# Altium PCB My_PCB.PcbDoc (part 2 of 2)
Units mm, origin at the board's own origin, x right, y up, seen from the top; angles counter-clockwise.
Board outline 160 x 126 mm, 4 copper layers (Top Layer, Layer 1, Layer 2, Bottom Layer), stack 1.646 mm thick; 190 components, 111 nets, 517 pads, 777 vias.
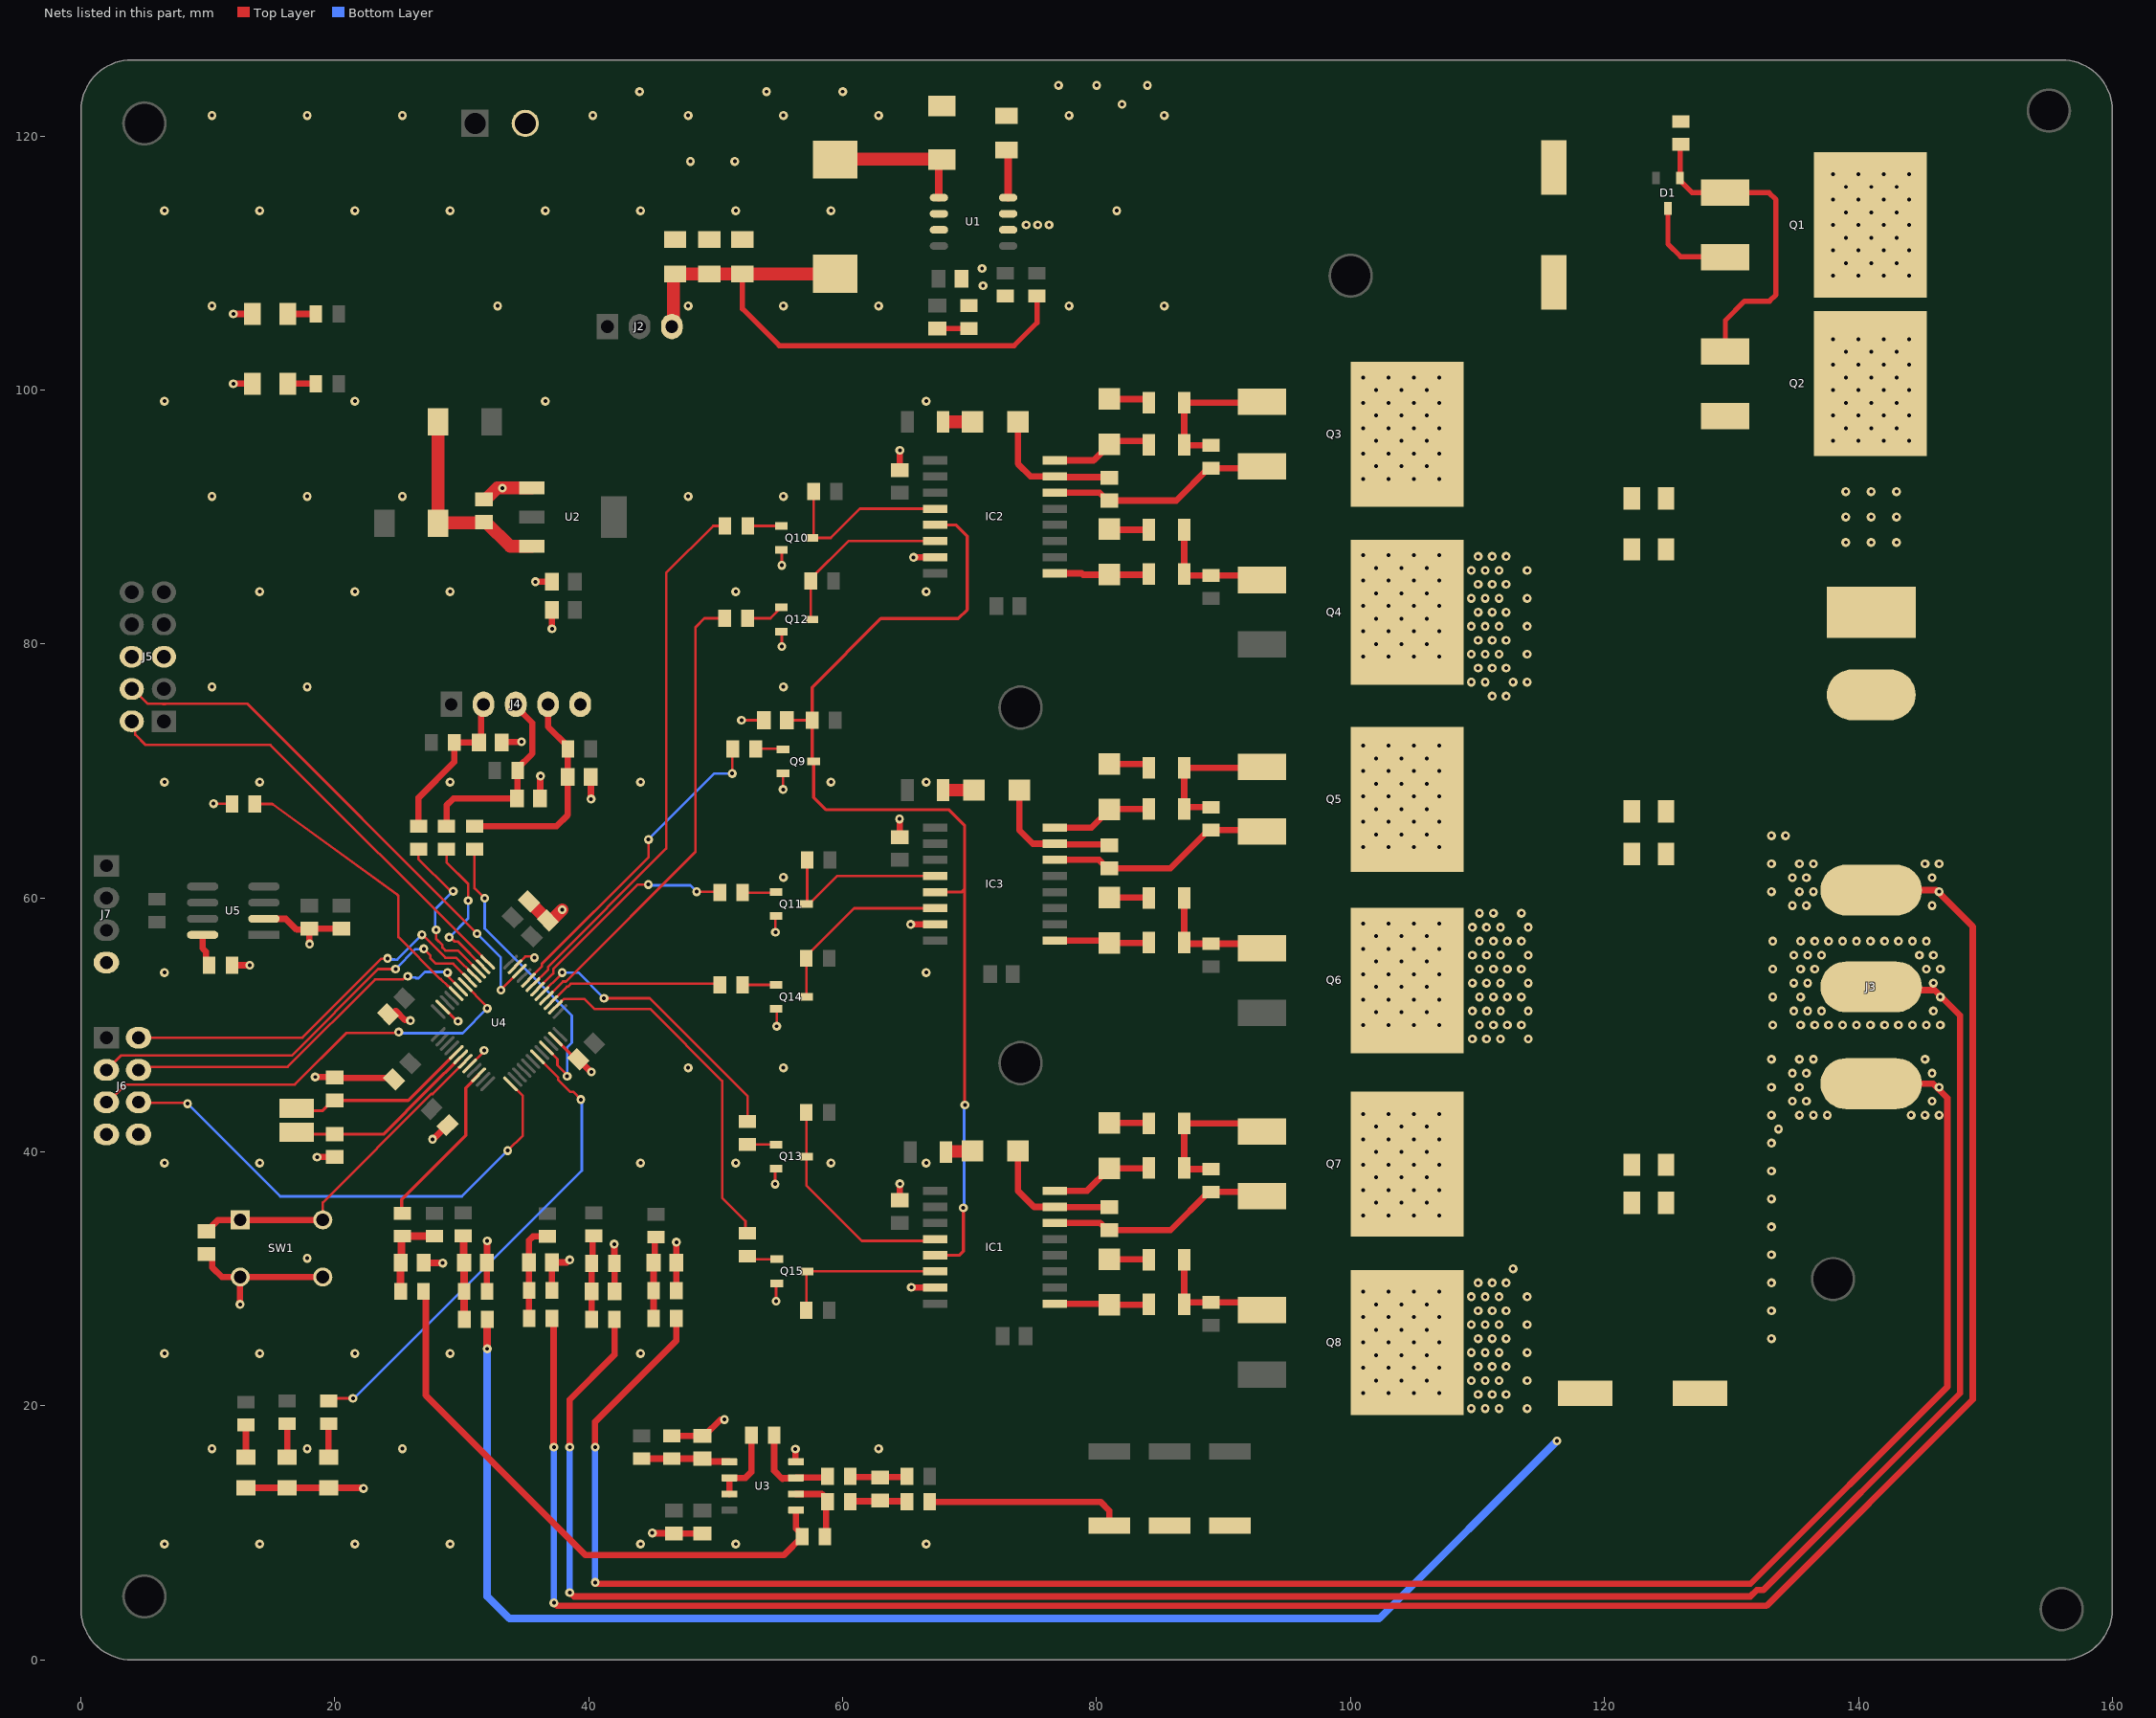
[diagram p4: the nets of this part, all layers, seen from the top]

## Via types
v1: diameter 0.7, hole 0.3, Top Layer to Bottom Layer, 777 vias

## Nets (pads, with @x,y where several pads share a name; then routed paths per layer and width w, separated by ;. In a path a pad name is that pad's centre, name@x,y a point inside that pad or via, vN(x,y) a via of type N, cw(c..) or ccw(c..) an arc to the next point about the centre after c; other vN are vias at no path point) (continued)
GND: C1.2 C3.2 C4.2 C5.2 C6.2 C7.2 C8.2 C9.2 C10.2 C11.2 C12.2 C14.2 C15.2 C16.2 C17.2 C18.2 C19.2 C24.2 C27.2 C28.2 C29.2 C30.2 C31.2 C32.2 C33.2 C34.2 C35.2 C36.2 C37.2 C38.2 C39.2 C40.2 C41.2 C42.2 C43.2 C44.2 C45.2 C46.2 C47.1 C48.1 C49.2 C50.2 D2.2 D5.1 D6.1 D16.K D17.K D18.K IC1.15 IC2.15 IC3.15 J1.2 J4.5 J5.5 J5.6 J6.7 J6.8 J7.4 P1.2 Q9.2 Q10.2 Q11.2 Q12.2 Q13.2 Q14.2 Q15.2 R1.1 R2.1 R4.1 R14.1 R21.1 R22.1 R23.1 R34.1 R36.1 R38.1 R44.1 R46.1 R68.2 R78.1 SW1.3 SW1.4 U1.2 U1.3 U1.6 U1.7 U2.1 U3.4 U4.8 U4.23 U4.35 U4.47 U5.2 | length 134.2
  Top Layer w0.2: v1(10.45,67.425) 11.875,67.425 R68.2@11.9,67.4 ; U4.47@28.479,51.427 28.506,51.427 29.634,50.3 v1(29.7,50.3) ; U4.8@30.6,46.76 30.6,46.788 31.75,47.937 v1(31.75,48) ; U4.35@34.207,54.609 34.997,55.4 35.49,55.4 35.59,55.3 v1(35.725,55.3) ; v1(54.675,37.475) 54.675,38.611 Q13.2@54.75,38.686 ; v1(54.7,57.3) 54.7,58.523 Q11.2@54.75,58.573 ; v1(54.75,28.25) 54.75,29.6 Q15.2@54.8,29.65 ; Q14.2@54.75,51.26 54.8,51.21 v1(54.8,49.9) ; Q12.2@55.172,80.983 55.2,80.955 v1(55.2,79.8) ; Q10.2@55.172,87.405 55.2,87.377 v1(55.2,86.2) ; v1(55.3,68.55) Q9.2@55.3,69.8 ; U3.4@56.275,15.655 U3.4@56.325,15.605
  Top Layer w0.25: U4.23@37.389,48.882 38.977,47.293 C43.2@39.161,47.293 ; v1(52.025,74) C50.2@53.8,74
  Top Layer w0.5: C40.2@9.9,31.95 10.05,31.95 10.35,31.65 10.35,30.9 11.1,30.15 SW1.3@12.55,30.15 ; R78.1@11.9,54.718 11.909,54.709 13.291,54.709 v1(13.3,54.7) ; v1(12,100.5) D6.1@13.5,100.5 ; v1(12,106) D5.1@13.5,106 ; v1(12.525,28) 12.525,30.125 SW1.3@12.55,30.15 ; D17.K@13,13.55 D16.K@16.25,13.55 D18.K@19.5,13.55 22.173,13.55 22.223,13.5 v1(22.25,13.5) ; U5.2@14.414,58.365 16.135,58.365 17,57.5 17.9,57.5 C48.1@18,57.6 ; v1(18,56.379) C48.1@18,57.6 ; v1(18.444,45.906) 19.951,45.906 C38.2@20,45.857 20.039,45.818 24.553,45.818 C45.2@24.765,45.606 ; v1(18.6,39.6) C39.2@20,39.6 ; SW1.4@19.05,30.15 SW1.3@12.55,30.15 ; C47.1@20.5,57.6 C48.1@18,57.6 ; C46.2@24.189,50.839 24.513,50.839 24.788,51.114 25.513,50.388 25.912,50.388 v1(25.95,50.35) ; C33.2@26.982,31.272 26.993,31.261 28.489,31.261 v1(28.5,31.25) ; v1(27.7,41) 27.736,41 28.85,42.114 C44.2@28.886,42.114 ; R46.1@31.982,29.022 C32.2@31.982,31.272 31.991,31.281 31.991,32.991 v1(32,33) ; C35.2@33.15,72.25 33.175,72.275 34.675,72.275 v1(34.7,72.3) ; v1(35.8,84.9) 35.802,84.898 37.098,84.898 C10.2@37.1,84.896 ; C36.2@36.15,67.841 36.175,67.866 36.175,69.575 v1(36.2,69.6) ; R34.1@37.1,29.096 C28.2@37.1,31.3 38.273,31.3 38.473,31.5 v1(38.5,31.5) ; v1(37.1,81.2) C49.2@37.1,82.691 ; C43.2@39.161,47.293 39.184,47.293 40.177,46.3 v1(40.2,46.3) ; C37.2@40.15,69.546 40.163,69.533 40.163,67.812 v1(40.175,67.8) ; v1(42,32.75) 42.01,32.74 42.01,31.237 R38.1@42.02,31.227 C29.2@42.02,29.023 ; v1(45,10) 45.025,9.975 46.675,9.975 C34.2@46.7,9.95 C31.2@48.95,9.95 ; R36.1@46.55,17.65 C27.2@48.95,17.65 49.1,17.65 50.356,18.906 50.656,18.906 v1(50.675,18.925) ; R44.1@46.9,29.091 C30.2@46.9,31.296 v1(46.9,32.9) ; U3.4@56.275,15.655 v1(56.275,16.6) ; v1(64.475,66.225) 64.488,66.212 64.488,64.812 C24.2@64.5,64.8 ; C18.2@64.5,36.205 v1(64.5,37.5) ; C19.2@64.5,93.705 v1@64.5,94.95 ; v1(65.35,57.925) IC3.15@67.288,57.925 ; v1(65.4,29.35) 65.413,29.338 67.275,29.338 IC1.15@67.288,29.325 ; v1(65.575,86.825) 65.584,86.834 67.279,86.834 IC2.15@67.288,86.842 ; R14.1@66.85,12.45 80.3,12.45 81,11.75 R23.1@81,10.575
  Top Layer w1: C9.2@31.75,91.4 31.9,91.4 32.8,92.3 U2.1@35.525,92.3 ; C41.2@35.278,59.738 C42.2@36.778,58.238 36.884,58.132 36.955,58.132 v1(37.898,59.075)
  other v1: 6.575,9.125 14.075,9.125 21.575,9.125 29.075,9.125 44.075,9.125 51.575,9.125 66.575,9.125 10.325,16.625 17.825,16.625 25.325,16.625 62.825,16.625 6.575,24.125 14.075,24.125 21.575,24.125 29.075,24.125 44.075,24.125 17.825,31.625 6.575,39.125 14.075,39.125 44.075,39.125 51.575,39.125 59.075,39.125 66.575,39.125 47.825,46.625 55.325,46.625 6.575,54.125 66.575,54.125 55.325,61.625 6.575,69.125 14.075,69.125 29.075,69.125 44.075,69.125 59.075,69.125 66.575,69.125 10.325,76.625 17.825,76.625 55.325,76.625 14.075,84.125 21.575,84.125 29.075,84.125 51.575,84.125 66.575,84.125 10.325,91.625 17.825,91.625 25.325,91.625 47.825,91.625 55.325,91.625 33.2,92.275 64.5,95.25 6.575,99.125 21.575,99.125 36.575,99.125 66.575,99.125 10.325,106.625 32.825,106.625 47.825,106.625 55.325,106.625 62.825,106.625 77.825,106.625 85.325,106.625 71.05,108.225 70.975,109.575 74.45,113 75.35,113 76.25,113 6.575,114.125 14.075,114.125 21.575,114.125 29.075,114.125 36.575,114.125 44.075,114.125 51.575,114.125 59.075,114.125 81.575,114.125 48,118 51.5,118 10.325,121.625 17.825,121.625 25.325,121.625 40.325,121.625 47.825,121.625 55.325,121.625 62.825,121.625 77.825,121.625 85.325,121.625 82,122.5 44,123.5 54,123.5 60,123.5 77,124 80,124 84,124
H1: IC2.12 Q10.3 R55.2 | length 14.4
  Top Layer w0.2: R55.2@57.7,92 57.7,88.484 Q10.3@57.572,88.355 59.055,88.355 61.354,90.654 67.286,90.654 IC2.12@67.288,90.652
H2: IC3.12 Q11.3 R56.2 | length 14.6
  Top Layer w0.2: R56.2@57.2,63.002 57.2,59.573 Q11.3@57.15,59.523 57.35,59.523 59.562,61.735 IC3.12@67.288,61.735
H3: IC1.12 Q13.3 R65.2 | length 17.8
  Top Layer w0.2: R65.2@57.132,43.116 57.15,43.099 Q13.3@57.15,39.636 ; Q13.3@57.15,39.636 57.15,37.35 61.5,33 67.153,33 IC1.12@67.288,33.135
hall_u: R58.1 U4.39 | length 13.4
  Top Layer w0.2: R58.1@26.591,63.85 26.591,63.05 29.035,60.607 29.254,60.607 v1(29.33,60.53) ; v1(27.975,57.5) 27.975,56.794 28.468,56.301 28.468,56.094 28.703,55.859 29.705,55.859 U4.39@31.308,54.256
  Bottom Layer w0.2: v1(27.975,57.5) 27.9,57.575 27.9,59.1 v1(29.33,60.53)
hall_v: R59.1 U4.38 | length 11.9
  Top Layer w0.2: R59.1@28.796,63.85 28.796,62.804 30.5,61.1 v1(30.5,59.8) ; v1(29,56.9) 29.108,56.9 29.438,56.57 29.7,56.57 U4.38@31.661,54.609
  Bottom Layer w0.2: v1(29,56.9) 30.5,58.4 v1(30.5,59.8)
hall_w: R60.1 U4.21 | length 24.1
  Top Layer w0.2: R60.1@31,63.85 31,60.775 v1(31.8,59.975) ; U4.21@36.682,48.175 36.682,48.17 37.528,47.324 37.528,46.838 38.291,46.074 v1(38.291,45.966)
  Bottom Layer w0.2: v1(31.8,59.975) 31.8,57.596 38.654,50.742 38.654,48.603 38.291,48.24 v1(38.291,45.966)
L1: IC2.14 Q12.3 R57.2 | length 14.3
  Top Layer w0.2: Q12.3@57.572,81.933 57.48,82.024 R57.2@57.48,84.961 57.48,85.136 60.456,88.112 IC2.14@67.288,88.112
L2: IC3.14 Q14.3 R66.2 | length 14.9
  Top Layer w0.2: Q14.3@57.15,52.21 57.132,52.227 R66.2@57.132,55.251 57.132,55.426 60.901,59.195 IC3.14@67.288,59.195
L3: IC1.14 Q15.3 R67.2 | length 13.2
  Top Layer w0.2: R67.2@57.132,27.525 57.132,30.532 Q15.3@57.2,30.6 67.283,30.6 IC1.14@67.288,30.595
LED: R77.2 U4.19 | length 38
  Top Layer w0.2: R77.2@19.5,20.4 19.7,20.6 v1(21.425,20.6) ; U4.19@35.974,47.468 37.587,45.855 37.587,45.674 38.522,44.74 38.76,44.74 v1(39.375,44.125)
  Bottom Layer w0.2: v1(21.425,20.6) 21.525,20.6 39.45,38.525 39.45,44.05 v1(39.375,44.125)
NetC2_2: C2.2 R1.2 | length 2.5
  Top Layer w0.4: C2.2@67.45,104.85 R1.2@69.95,104.85
NetC6_1: C6.1 C7.1 C8.1 J2.3 L1.2 R3.2 | length 46.9
  Top Layer w0.4: C8.1@52.1,109.15 52.1,106.4 55,103.5 73.5,103.5 75.3,105.3 R3.2@75.3,107.4
  Top Layer w1: J2.3@46.54,105 46.67,105.13 46.67,109.02 C6.1@46.8,109.15 C7.1@49.5,109.15 C8.1@52.1,109.15 L1.2@59.4,109.15
NetC9_1: C9.1 D3.1 D4.1 U2.3 | length 16.2
  Top Layer w1: D4.1@28.11,89.5 D4.1@28.125,89.515 ; D3.1@28.14,97.5 28.125,97.485 D4.1@28.125,89.515 ; U2.3@35.525,87.7 33.8,87.7 31.9,89.6 C9.1@31.75,89.6 31.7,89.55 28.16,89.55 D4.1@28.125,89.515
NetC13_1: C13.1 R13.2 R39.1 | length 4.5
  Top Layer w0.5: R39.1@60.6,14.45 60.65,14.4 62.9,14.4 C13.1@62.95,14.35 63,14.4 65,14.4 R13.2@65.05,14.45
NetC13_2: C13.2 R14.2 R40.1 | length 4.5
  Top Layer w0.5: R40.1@60.6,12.45 60.65,12.5 62.9,12.5 C13.2@62.95,12.55 63,12.5 65,12.5 R14.2@65.05,12.45
NetC20_1: C20.1 D13.1 IC1.7 | length 10.9
  Top Layer w0.5: D13.1@73.79,40.091 73.79,36.96 75.075,35.675 IC1.7@76.712,35.675 76.724,35.663 80.988,35.663 C20.1@81,35.65
NetC20_2: C20.2 IC1.6 J3.3 Q7.S Q8.D R28.1 R43.2 | length 183.5
  Top Layer w0.5: v1(40.5,6.104) 40.527,6.104 40.631,6 131.5,6 147,21.5 147,44.25 145.87,45.38 J3.3@141,45.38 ; v1(40.5,16.75) 40.5,18.75 46.9,25.15 R43.2@46.9,26.887 ; IC1.6@76.712,34.405 80.295,34.405 80.85,33.85 C20.2@81,33.85 85.825,33.85 88.825,36.85 R28.1@89,36.85 92.683,36.85 Q7.S@93.015,36.518
  Bottom Layer w0.5: v1(40.5,6.104) v1(40.5,16.75)
  other v1: 109.5,19.8 110.6,19.8 111.7,19.8 113.9,19.8 110.05,20.9 111.15,20.9 112.25,20.9 101,21 103,21 105,21 107,21 102,22 104,22 106,22 109.5,22 110.6,22 111.7,22 113.9,22 101,23 103,23 105,23 107,23 110.05,23.1 111.15,23.1 112.25,23.1 102,24 104,24 106,24 109.5,24.2 110.6,24.2 111.7,24.2 113.9,24.2 101,25 103,25 105,25 107,25 110.05,25.3 111.15,25.3 112.25,25.3 133.15,25.3 102,26 104,26 106,26 109.5,26.4 110.6,26.4 111.7,26.4 113.9,26.4 101,27 103,27 105,27 107,27 110.05,27.5 111.15,27.5 112.25,27.5 133.15,27.5 102,28 104,28 106,28 109.5,28.6 110.6,28.6 111.7,28.6 113.9,28.6 101,29 103,29 105,29 107,29 110.05,29.7 111.15,29.7 112.25,29.7 133.15,29.7 112.8,30.8 133.15,31.9 133.15,34.1 133.15,36.3 133.15,38.5 133.15,40.7 133.7,41.8 133.15,42.9 135.35,42.9 136.45,42.9 137.55,42.9 144.15,42.9 145.25,42.9 146.35,42.9 134.8,44 135.9,44 145.8,44 133.15,45.1 135.35,45.1 146.35,45.1 134.8,46.2 135.9,46.2 145.8,46.2 133.15,47.3 135.35,47.3 136.45,47.3 145.25,47.3
NetC22_1: C22.1 D14.1 IC2.7 | length 11
  Top Layer w0.5: D14.1@73.79,97.5 73.79,94.21 74.8,93.2 76.704,93.2 IC2.7@76.712,93.192 76.759,93.145 80.953,93.145 C22.1@81,93.098
NetC25_1: C25.1 D15.1 IC3.7 | length 10.7
  Top Layer w0.5: D15.1@73.9,68.5 73.9,65.35 74.975,64.275 IC3.7@76.712,64.275 76.775,64.213 80.937,64.213 C25.1@81,64.15
NetC27_1: C27.1 R35.1 R36.2 U3.5 | length 7
  Top Layer w0.5: R35.1@44.15,15.85 R36.2@46.55,15.85 C27.1@48.95,15.85 49.17,15.63 51.05,15.63 U3.5@51.075,15.605
NetC28_1: C28.1 R33.1 R34.2 R69.2 | length 7.7
  Top Layer w0.5: R33.1@35.3,26.892 R34.2@35.3,29.096 C28.1@35.3,31.3 35.3,33.05 35.6,33.35 R69.2@36.75,33.35
NetC29_1: C29.1 R37.1 R38.2 R70.2 | length 6.7
  Top Layer w0.5: R37.1@40.22,26.818 C29.1@40.22,29.023 R38.2@40.22,31.227 40.31,31.317 40.31,33.31 R70.2@40.4,33.4
NetC30_1: C30.1 R43.1 R44.2 R71.2 | length 6.5
  Top Layer w0.5: R43.1@45.1,26.887 R44.2@45.1,29.091 C30.1@45.1,31.296 45.2,31.396 45.2,33.2 R71.2@45.3,33.3
NetC32_1: C32.1 R45.1 R46.2 R74.2 | length 6.6
  Top Layer w0.6: R74.2@30.1,33.4 30.141,33.359 30.141,31.313 C32.1@30.182,31.272 R46.2@30.182,29.022 30.191,29.013 30.191,26.826 R45.1@30.2,26.817
NetC33_1: C33.1 R47.2 R72.2 R73.2 | length 6.9
  Top Layer w0.6: R47.2@25.182,29.022 C33.1@25.182,31.272 25.257,31.347 25.257,33.297 R72.2@25.332,33.372 R73.2@27.832,33.372
NetC35_1: C35.1 J4.2 R48.1 R58.2 | length 12.9
  Top Layer w0.5: R58.2@26.591,65.65 26.591,67.891 29.4,70.7 R48.1@29.4,72.25 C35.1@31.35,72.25 31.53,72.43 31.53,75.07 J4.2@31.71,75.25
NetC36_1: C36.1 J4.3 R49.1 R59.2 | length 15.9
  Top Layer w0.5: R59.2@28.796,65.65 28.796,67.296 29.341,67.841 C36.1@34.35,67.841 34.375,67.866 34.375,70.021 R49.1@34.4,70.046 34.4,70.221 35.554,71.375 35.554,73.796 34.25,75.1 J4.3@34.25,75.25
NetC37_1: C37.1 J4.4 R50.1 R60.2 | length 17.1
  Top Layer w0.5: R60.2@31,65.65 37.45,65.65 38.35,66.55 C37.1@38.35,69.546 R50.1@38.35,71.75 38.35,71.925 36.79,73.485 J4.4@36.79,75.25
NetC38_1: C38.1 U4.5 Y1.1 | length 14.5
  Top Layer w0.25: Y1.1@17,43.45 17.2,43.25 19.043,43.25 19.85,44.057 C38.1@20,44.057 25.776,44.057 U4.5@29.54,47.821
NetC39_1: C39.1 U4.6 Y1.2 | length 15.5
  Top Layer w0.25: Y1.2@17,41.55 17.15,41.4 C39.1@20,41.4 23.824,41.4 27.419,44.995 27.421,44.995 U4.6@29.893,47.468
NetD1_1: D1.1 Q1.G Q2.G R2.2 | length 25.8
  Top Layer w0.4: R2.2@126,119.35 125.95,119.3 125.95,116.5 126.91,115.54 Q1.G@129.515,115.54 132.96,115.54 133.5,115 133.5,107.5 133,107 131.03,107 129.515,105.485 Q2.G@129.515,103.04
NetD2_1: D2.1 L1.1 U1.1 | length 11.5
  Top Layer w0.6: U1.1@67.575,115.155 67.575,117.915 D2.1@67.8,118.14
  Top Layer w1: L1.1@59.4,118.15 59.445,118.195 67.745,118.195 D2.1@67.8,118.14
NetD5_2: D5.2 R5.1 | length 2.2
  Top Layer w0.5: D5.2@16.3,106 R5.1@18.5,106
NetD6_2: D6.2 R6.1 | length 2.2
  Top Layer w0.5: D6.2@16.3,100.5 R6.1@18.5,100.5
NetD7_1: D7.1 IC2.8 R7.1 | length 8
  Top Layer w0.5: IC2.8@76.712,94.462 79.762,94.462 81.3,96 R7.1@84.1,96
NetD7_2: D7.2 R8.1 | length 3.2
  Top Layer w0.5: D7.2@81,99.29 83.85,99.29 84.1,99.04 R8.1@84.1,99
NetD8_1: D8.1 IC2.1 R9.1 | length 7.5
  Top Layer w0.5: IC2.1@76.712,85.572 78.824,85.572 78.936,85.46 D8.1@81,85.46 84.06,85.46 R9.1@84.1,85.5
NetD8_2: D8.2 R10.1 | length 3.1
  Top Layer w0.5: D8.2@81,89.04 81.04,89 R10.1@84.1,89
NetD9_1: D9.1 IC3.8 R15.1 | length 8
  Top Layer w0.5: IC3.8@76.712,65.545 79.595,65.545 81,66.95 D9.1@81,66.96 81.04,67 R15.1@84.1,67
NetD9_2: D9.2 R16.1 | length 3.2
  Top Layer w0.5: D9.2@81,70.54 83.85,70.54 84.1,70.29 R16.1@84.1,70.25
NetD10_1: D10.1 IC3.1 R17.1 | length 7.5
  Top Layer w0.5: IC3.1@76.712,56.655 80.805,56.655 D10.1@81,56.46 84.06,56.46 R17.1@84.1,56.5
NetD10_2: D10.2 R18.1 | length 3.1
  Top Layer w0.5: D10.2@81,60.04 84.06,60.04 R18.1@84.1,60
NetD11_1: D11.1 IC1.8 R24.1 | length 8.1
  Top Layer w0.5: IC1.8@76.712,36.945 79.245,36.945 81,38.7 D11.1@81,38.71 84.06,38.71 R24.1@84.1,38.75
NetD11_2: D11.2 R25.1 | length 3.1
  Top Layer w0.5: D11.2@81,42.29 84.06,42.29 R25.1@84.1,42.25
NetD12_1: D12.1 IC1.1 R26.1 | length 7.4
  Top Layer w0.5: IC1.1@76.712,28.055 80.905,28.055 D12.1@81,27.96 84.06,27.96 R26.1@84.1,28
NetD12_2: D12.2 R27.1 | length 3.1
  Top Layer w0.5: D12.2@81,31.54 84.06,31.54 R27.1@84.1,31.5
NetD13_2: D13.2 R30.2 | length 2.1
  Top Layer w1: R30.2@68.131,40 68.131,40.045 70.165,40.045 D13.2@70.21,40.091
NetD14_2: D14.2 R31.2 | length 2.3
  Top Layer w1: R31.2@67.9,97.5 D14.2@70.21,97.5
NetD15_2: D15.2 R32.2 | length 2.4
  Top Layer w1: R32.2@67.9,68.5 D15.2@70.32,68.5
NetD16_A: D16.A R75.1 | length 2.6
  Top Layer w0.5: D16.A@16.25,15.95 R75.1@16.25,18.6
NetD17_A: D17.A R76.1 | length 2.6
  Top Layer w0.5: D17.A@13,15.95 R76.1@13,18.5
NetD18_A: D18.A R77.1 | length 2.6
  Top Layer w0.5: D18.A@19.5,15.95 R77.1@19.5,18.6
NetQ3_G: Q3.G R7.2 R8.2 R11.2 | length 11.3
  Top Layer w0.5: R7.2@86.9,95.7 86.95,95.65 R11.2@89,95.65 ; R7.2@86.9,96 R8.2@86.9,99 92.948,99 Q3.G@93.015,99.067
NetQ4_G: Q4.G R9.2 R10.2 R12.2 | length 9.8
  Top Layer w0.5: R10.2@86.9,89 R9.2@86.9,85.5 87,85.4 R12.2@89,85.4 92.655,85.4 Q4.G@93.015,85.04
NetQ5_G: Q5.G R15.2 R16.2 R19.2 | length 11.6
  Top Layer w0.5: R19.2@89,67.15 87.05,67.15 R15.2@86.9,67 R16.2@86.9,70.25 92.95,70.25 Q5.G@93.015,70.315
NetQ6_G: Q6.G R17.2 R18.2 R20.2 | length 9.8
  Top Layer w0.5: R18.2@86.9,60 R17.2@86.9,56.5 87,56.4 R20.2@89,56.4 92.655,56.4 Q6.G@93.015,56.04
NetQ7_G: Q7.G R24.2 R25.2 R28.2 | length 12
  Top Layer w0.5: R28.2@89,38.65 87,38.65 R24.2@86.9,38.75 R25.2@86.9,42.25 92.363,42.25 Q7.G@93.015,41.598
NetQ8_G: Q8.G R26.2 R27.2 R29.2 | length 9.9
  Top Layer w0.5: R27.2@86.9,31.5 R26.2@86.9,28 87.05,28.15 R29.2@89,28.15 92.405,28.15 Q8.G@93.015,27.54
NetQ9_1: Q9.1 R61.1 | length 2.2
  Top Layer w0.2: R61.1@53.15,71.75 55.25,71.75 Q9.1@55.3,71.7
NetQ10_1: Q10.1 R51.2 | length 2.7
  Top Layer w0.2: R51.2@52.522,89.305 Q10.1@55.172,89.305
NetQ11_1: Q11.1 R52.2 | length 2.7
  Top Layer w0.2: R52.2@52.114,60.423 54.7,60.423 Q11.1@54.75,60.473
NetQ12_1: Q12.1 R53.2 | length 3
  Top Layer w0.2: R53.2@52.5,82.025 54.313,82.025 Q12.1@55.172,82.883
NetQ13_1: Q13.1 R62.2 | length 2.3
  Top Layer w0.2: R62.2@52.5,40.6 54.736,40.6 Q13.1@54.75,40.586
NetQ14_1: Q14.1 R63.2 | length 2.6
  Top Layer w0.2: R63.2@52.114,53.166 54.744,53.166 Q14.1@54.75,53.16
NetQ15_1: Q15.1 R64.2 | length 2.4
  Top Layer w0.2: R64.2@52.5,31.8 52.75,31.55 Q15.1@54.8,31.55
NetR39_2: R39.2 R41.1 U3.3 | length 7.4
  Top Layer w0.5: R41.1@54.6,17.7 54.6,14.9 55.25,14.25 55.31,14.31 56.3,14.31 U3.3@56.325,14.335 56.35,14.36 58.71,14.36 R39.2@58.8,14.45
NetR40_2: R40.2 R42.2 U3.2 | length 5.7
  Top Layer w0.5: U3.2@56.325,13.065 58.36,13.065 58.8,12.625 R40.2@58.8,12.45 58.7,12.35 58.7,9.8 R42.2@58.6,9.7
NetR41_2: R41.2 U3.6 U3.7 | length 6.1
  Top Layer w0.5: U3.7@51.075,13.065 U3.6@51.075,14.335 52.335,14.335 52.8,14.8 R41.2@52.8,17.7
NetR42_1: R42.1 R47.1 U3.1 | length 46
  Top Layer w0.5: R47.1@26.982,29.022 27.167,28.837 27.167,20.833 39.75,8.25 55.35,8.25 R42.1@56.8,9.7 56.8,9.875 56.325,10.35 U3.1@56.325,11.795
NetR61_2: R61.2 U4.32 | length 25.7
  Top Layer w0.2: U4.32@35.267,53.549 35.267,53.576 36.3,54.608 36.3,54.8 44.7,63.2 v1(44.7,64.6) ; v1(51.3,69.8) 51.3,71.7 R61.2@51.35,71.75
  Bottom Layer w0.2: v1(44.7,64.6) 49.9,69.8 v1(51.3,69.8)
NetR68_1: R68.1 U4.44 | length 23.3
  Top Layer w0.2: R68.1@13.7,67.4 15.069,67.4 15.121,67.362 24.917,60.26 cw(c24.8,60.098) 25,60.098 25,56.922 28.297,53.625 28.332,53.625 28.889,53.068 28.932,53.068 29.513,52.488 U4.44@29.54,52.488
NetR78_2: R78.2 U5.8 | length 2.6
  Top Layer w0.5: U5.8@9.586,57.095 9.586,56.034 9.85,55.77 9.85,54.968 R78.2@10.1,54.718
over_current: R72.1 U4.10 | length 13.4
  Top Layer w0.25: R72.1@25.332,35.172 25.25,35.254 25.25,36.25 30.3,41.3 30.3,45.046 U4.10@31.308,46.053
PA3: J6.6 U4.13 | length 39.8
  Top Layer w0.2: J6.6@4.54,43.92 4.6,43.86 8.34,43.86 v1(8.4,43.8) ; v1(33.615,40.11) 34.8,41.296 34.8,44.399 U4.13@33.853,45.346
  Bottom Layer w0.2: v1(8.4,43.8) 15.7,36.5 30.004,36.5 v1(33.615,40.11)
PB4: J6.2 U4.40 | length 31.2
  Top Layer w0.2: J6.2@4.54,49 17.444,49 23.662,55.219 24.099,55.219 v1@24.131,55.25 ; v1(26.85,57.1) 26.896,57.1 28.696,55.3 29.556,55.3 U4.40@30.954,53.902
  Bottom Layer w0.2: v1(24.15,55.25) 24.246,55.154 24.696,55.154 24.7,55.15 24.9,55.15 v1(26.85,57.1)
PB5: J6.3 U4.41 | length 33.7
  Top Layer w0.2: J6.3@2,46.46 3.14,47.6 4.239,47.6 cw(c4.39,46.46) 4.39,47.61 4.69,47.61 cw(c4.69,46.46) 4.841,47.6 16.609,47.6 23.409,54.4 v1(24.775,54.4) ; v1(27,56) 27.518,55.482 27.518,55.258 27.94,54.836 29.313,54.836 U4.41@30.6,53.549
  Bottom Layer w0.2: v1(24.775,54.4) 26.35,55.975 26.975,55.975 v1(27,56)
PB6: J6.5 U4.42 | length 35.8
  Top Layer w0.2: J6.5@2,43.92 2.15,43.92 3.54,45.31 16.853,45.31 20.916,49.373 24.966,49.373 v1(25.03,49.438) ; U4.42@30.247,53.195 31.923,51.519 31.923,51.377 v1(32,51.3)
  Bottom Layer w0.2: v1(25.03,49.438) 25.117,49.35 30.05,49.35 v1(32,51.3)
PB7: J6.4 U4.43 | length 29.4
  Top Layer w0.2: J6.4@4.54,46.46 4.78,46.7 16.275,46.7 23.166,53.591 25.364,53.591 25.609,53.835 v1(25.744,53.835) ; v1(28.875,54.125) 28.971,54.029 28.971,53.764 U4.43@29.893,52.842
  Bottom Layer w0.2: v1(25.744,53.835) 25.832,53.747 26.325,53.747 26.387,53.685 26.587,53.685 27.084,54.182 28.818,54.182 v1(28.875,54.125)
power: J1.1 Q1.D Q2.D
  other v1: 139,88 141,88 143,88 139,90 141,90 143,90 139,92 141,92 143,92 138,96 140,96 142,96 144,96 139,97 141,97 143,97 138,98 140,98 142,98 144,98 139,99 141,99 143,99 138,100 140,100 142,100 144,100 139,101 141,101 143,101 138,102 140,102 142,102 144,102 139,103 141,103 143,103 138,104 140,104 142,104 144,104 138,109 140,109 142,109 144,109 139,110 141,110 143,110 138,111 140,111 142,111 144,111 139,112 141,112 143,112 138,113 140,113 142,113 144,113 139,114 141,114 143,114 138,115 140,115 142,115 144,115 139,116 141,116 143,116 138,117 140,117 142,117 144,117
PWM_h1: R51.1 U4.31 | length 42.9
  Top Layer w0.2: U4.31@35.621,53.195 36.796,54.37 36.796,54.582 46.1,63.886 46.1,85.6 49.805,89.305 R51.1@50.722,89.305
PWM_h2: R52.1 U4.30 | length 18.2
  Top Layer w0.2: U4.30@35.974,52.842 37.196,54.063 37.196,54.417 43.843,61.064 v1(44.686,61.064) ; v1(48.5,60.5) 50.236,60.5 R52.1@50.314,60.423
  Bottom Layer w0.2: v1(44.686,61.064) 44.75,61 48,61 v1(48.5,60.5)
PWM_h3: R62.1 U4.29 | length 22.9
  Top Layer w0.2: U4.29@36.328,52.488 36.328,52.508 37.9,54.08 v1(37.9,54.125) ; v1(41.2,52.1) 44.8,52.1 52.5,44.4 R62.1@52.5,42.4
  Bottom Layer w0.2: v1(37.9,54.125) 39.175,54.125 v1(41.2,52.1)
PWM_l1: R53.1 U4.28 | length 36.8
  Top Layer w0.2: U4.28@36.682,52.134 37.968,53.421 38.192,53.421 48.4,63.629 48.4,81.325 49.1,82.025 R53.1@50.7,82.025
PWM_l2: R63.1 U4.27 | length 13.9
  Top Layer w0.2: U4.27@37.035,51.781 38.275,53.021 38.357,53.021 38.586,53.25 50.229,53.25 R63.1@50.314,53.166
PWM_l3: R64.1 U4.26 | length 28.9
  Top Layer w0.2: U4.26@37.389,51.427 37.416,51.427 38.042,52.054 39.646,52.054 40.439,51.261 44.839,51.261 50.5,45.6 50.5,36.4 52.339,34.561 52.339,33.761 R64.1@52.5,33.6
R_BUTTON: C40.1 SW1.1 SW1.2 U4.7 | length 26.8
  Top Layer w0.2: SW1.2@19.05,34.65 19.05,36.025 27.595,44.57 27.703,44.57 U4.7@30.247,47.114
  Top Layer w0.5: C40.1@9.9,33.75 10.05,33.75 10.35,34.05 10.35,34.2 10.8,34.65 SW1.2@19.05,34.65
sd: C50.1 IC1.13 IC2.13 IC3.13 Q9.3 R54.1 | length 85.3
  Top Layer w0.25: C50.1@55.6,74 R54.1@57.6,74 ; IC1.13@67.288,31.865 69.165,31.865 69.5,32.2 v1(69.5,35.6) ; IC3.13@67.288,60.465 69.365,60.465 69.4,60.5 69.6,60.7 ; IC2.13@67.288,89.382 68.918,89.382 69.8,88.5 69.8,82.7 69.1,82 63,82 57.6,76.6 R54.1@57.6,74 ; v1(69.625,43.7) 69.6,43.725 69.6,60.7 ; R54.1@57.6,74 57.6,70.85 Q9.3@57.7,70.75 57.7,67.917 58.663,66.954 68.346,66.954 69.6,65.7 69.6,60.7
  Bottom Layer w0.25: v1(69.5,35.6) 69.562,35.662 69.562,43.638 v1(69.625,43.7)
SWCLK: J5.2 U4.37 | length 36.3
  Top Layer w0.2: J5.2@4,73.92 4.281,73.639 4.281,72.869 5.1,72.05 14.928,72.05 U4.37@32.015,54.963
SWDIO: J5.4 U4.34 | length 42.5
  Top Layer w0.2: J5.4@4,76.46 4.1,76.46 5.187,75.373 5.26,75.3 6.253,75.3 ccw(c6.44,76.46) 6.44,75.285 6.64,75.285 ccw(c6.64,76.46) 6.827,75.3 13.1,75.3 v1(31.2,57.2) ; v1(33.075,52.75) 33.075,52.771 U4.34@34.543,54.238
  Bottom Layer w0.2: v1(31.2,57.2) 33.075,55.325 v1(33.075,52.75)
U: C22.2 IC2.6 J3.1 Q3.S Q4.D R11.1 R33.2 | length 205.2
  Top Layer w0.5: R33.2@37.1,26.892 37.231,26.761 37.231,16.769 v1(37.25,16.75) ; v1(37.25,4.5) 37.277,4.5 37.527,4.25 132.75,4.25 149,20.5 149,57.75 146.13,60.62 J3.1@141,60.62 ; IC2.6@76.712,91.922 80.225,91.922 80.85,91.298 C22.2@81,91.298 86.273,91.298 88.825,93.85 R11.1@89,93.85 92.878,93.85 Q3.S@93.015,93.987
  Bottom Layer w0.5: v1(37.25,4.5) v1(37.25,16.75)
  other v1: 134.8,59.4 135.9,59.4 145.8,59.4 133.15,60.5 135.35,60.5 136.45,60.5 146.35,60.5 134.8,61.6 135.9,61.6 145.8,61.6 133.15,62.7 135.35,62.7 136.45,62.7 145.25,62.7 146.35,62.7 133.15,64.9 134.25,64.9 111.15,75.9 112.25,75.9 109.5,77 110.6,77 112.8,77 113.9,77 110.05,78.1 111.15,78.1 112.25,78.1 101,79 103,79 105,79 107,79 109.5,79.2 110.6,79.2 111.7,79.2 113.9,79.2 102,80 104,80 106,80 110.05,80.3 111.15,80.3 112.25,80.3 101,81 103,81 105,81 107,81 109.5,81.4 110.6,81.4 111.7,81.4 113.9,81.4 102,82 104,82 106,82 110.05,82.5 111.15,82.5 112.25,82.5 101,83 103,83 105,83 107,83 109.5,83.6 110.6,83.6 111.7,83.6 113.9,83.6 102,84 104,84 106,84 110.05,84.7 111.15,84.7 112.25,84.7 101,85 103,85 105,85 107,85 109.5,85.8 110.6,85.8 111.7,85.8 113.9,85.8 102,86 104,86 106,86 110.05,86.9 111.15,86.9 112.25,86.9 101,87 103,87 105,87 107,87
V: C25.2 IC3.6 J3.2 Q5.S Q6.D R19.1 R37.2 | length 194.8
  Top Layer w0.5: v1(38.5,5.304) 38.527,5.304 38.831,5 131.49,5 131.99,5.5 132.5,5.5 148,21 148,50.75 146,52.75 141.25,52.75 J3.2@141,53 ; v1(38.5,16.75) 38.5,20.5 42.02,24.02 R37.2@42.02,26.818 ; IC3.6@76.712,63.005 80.195,63.005 80.85,62.35 C25.2@81,62.35 85.825,62.35 88.825,65.35 R19.1@89,65.35 92.9,65.35 Q5.S@93.015,65.235
  Bottom Layer w0.5: v1(38.5,5.304) v1(38.5,16.75)
  other v1: 109.6,48.9 110.7,48.9 111.8,48.9 114,48.9 101,50 103,50 105,50 107,50 110.15,50 111.25,50 112.35,50 113.45,50 133.25,50 135.45,50 136.55,50 137.65,50 138.75,50 139.85,50 140.95,50 142.05,50 143.15,50 144.25,50 145.35,50 146.45,50 102,51 104,51 106,51 109.6,51.1 110.7,51.1 111.8,51.1 114,51.1 134.9,51.1 136,51.1 137.1,51.1 145.9,51.1 101,52 103,52 105,52 107,52 110.15,52.2 111.25,52.2 112.35,52.2 113.45,52.2 133.25,52.2 135.45,52.2 146.45,52.2 102,53 104,53 106,53 109.6,53.3 110.7,53.3 111.8,53.3 114,53.3 134.9,53.3 136,53.3 145.9,53.3 101,54 103,54 105,54 107,54 110.15,54.4 111.25,54.4 112.35,54.4 113.45,54.4 133.25,54.4 135.45,54.4 136.55,54.4 145.35,54.4 146.45,54.4 102,55 104,55 106,55 109.6,55.5 110.7,55.5 111.8,55.5 114,55.5 134.9,55.5 136,55.5 137.1,55.5 144.8,55.5 145.9,55.5 101,56 103,56 105,56 107,56 110.15,56.6 111.25,56.6 112.35,56.6 113.45,56.6 133.25,56.6 135.45,56.6 136.55,56.6 137.65,56.6 138.75,56.6 139.85,56.6 140.95,56.6 142.05,56.6 143.15,56.6 144.25,56.6 145.35,56.6 102,57 104,57 106,57 109.6,57.7 110.7,57.7 111.8,57.7 114,57.7 101,58 103,58 105,58 107,58 110.15,58.8 111.25,58.8 113.45,58.8
VM: C1.1 C4.1 C5.1 C11.1 C12.1 C14.1 C15.1 C16.1 C17.1 D1.3 Q1.S Q2.S Q3.D Q5.D Q7.D R45.2 U1.8 | length 124.1
  Top Layer w0.4: D1.3@125,114.3 125,111.5 126,110.5 129.475,110.5 Q1.S@129.515,110.46
  Top Layer w0.6: v1(32,24.5) R45.2@32,26.817 ; C1.1@72.9,118.9 73.025,118.775 U1.8@73.025,115.155
  Bottom Layer w0.6: v1(32,24.5) 32,5 33.75,3.25 102.25,3.25 v1(116.25,17.25)
  other v1: 101,35 103,35 105,35 107,35 102,36 104,36 106,36 101,37 103,37 105,37 107,37 102,38 104,38 106,38 101,39 103,39 105,39 107,39 102,40 104,40 106,40 101,41 103,41 105,41 107,41 102,42 104,42 106,42 101,43 103,43 105,43 107,43 101,64 103,64 105,64 107,64 102,65 104,65 106,65 101,66 103,66 105,66 107,66 102,67 104,67 106,67 101,68 103,68 105,68 107,68 102,69 104,69 106,69 101,70 103,70 105,70 107,70 102,71 104,71 106,71 101,72 103,72 105,72 107,72 101,93 103,93 105,93 107,93 102,94 104,94 106,94 101,95 103,95 105,95 107,95 102,96 104,96 106,96 101,97 103,97 105,97 107,97 102,98 104,98 106,98 101,99 103,99 105,99 107,99 102,100 104,100 106,100 101,101 103,101 105,101 107,101
pads on no net: D1.2 IC1.4 IC1.5 IC1.9 IC1.10 IC1.16 IC2.4 IC2.5 IC2.9 IC2.10 IC2.16 IC3.4 IC3.5 IC3.9 IC3.10 IC3.16 J5.1 J5.3 J5.7 J5.8 MH1.1 MH2.1 MH3.1 MH4.1 MH5.1 MH6.1 MH7.1 MH8.1 U4.2 U4.3 U4.4 U4.16 U4.20 U4.25 U4.33 U5.5

## Polygon pours and split planes (outlines as drawn)
GND on Top Layer "GND_L01_P002" (solid, pour order 2): 109.125,118.125 106.625,120.625 101.125,120.625 55.125,120.625 53.875,119.375 53.875,111.375 53.375,110.875 45.625,110.875 45.125,111.375 45.125,116.375 43.875,117.625 35.375,117.625 33.875,119.125 33.875,124.875 34.625,125.625 154.125,125.625 156.625,123.125 156.625,76.625 147.625,67.625 134.125,67.625 132.625,66.125 132.625,9.375 130.625,7.375 78.875,7.375 78.125,8.125 78.125,11.625 79.125,12.625 95.125,12.625 96.625,14.125 96.625,17.125 97.625,18.125 113.125,18.125 114.125,17.125 114.125,14.625 115.125,13.625 122.125,13.625 124.125,15.625 124.125,93.625 125.125,94.625 134.625,94.625 135.625,93.625 135.625,79.625 136.625,78.625 147.125,78.625 148.125,79.625 148.125,120.625 122.125,120.625 122.125,116.125 120.125,114.125 110.625,114.125 109.125,115.625
VM on Top Layer "VM_L01_P001" (solid, pour order 1): 108.25,114.875 110.5,112.625 110.5,112.5 131.5,112.5 132,112 132,108.5 131.5,108 126.5,108 126.5,100 131.5,100 132.5,99 132.5,96.5 131.5,95.5 124.5,95.5 123,94 123,15.917 121.9,15 114.875,15 114.875,30.125 113,32 100,32 99,33 99,45 100,46 113,46 114.875,47.875 114.875,59.125 113.5,60.5 100,60.5 99,61.5 99,73.5 100,74.5 112.5,74.5 114.875,76.875 114.875,88.125 113,90 100,90 99,91 99,112 96.25,114.75 71.5,114.75 71.25,115 71.25,119.25 71.75,119.75 105.75,119.75 108.25,117.25
NetC20_2 on Top Layer "NETC20_2_L01_P037" (solid, pour order 37): 134,48 146,48 147,47 147,43 146,42 134,42
V on Top Layer "V_L01_P036" (solid, pour order 36): 134,57 146,57 147,56 147,50 146,49 134,49
U on Top Layer "U_L01_P035" (solid, pour order 35): 146,64 147,63 147,59 146,58 134,58 134,64
V on Top Layer "V_L01_P004" (solid, pour order 4): 113,58 111.5,59.5 100,59.5 97.5,62 97.5,66 96.5,67 91.5,67 90.5,66 90.5,62.5 97,56 97,49 98.5,47.5 111.5,47.5 113,49
com on Top Layer "COM_L01_P020" (solid, pour order 20): 95.5,81.5 78.5,81.5 78.5,76.5 95.5,76.5
+3.3 on Top Layer "+3.3_L01_P034" (solid, pour order 34): 34.5,91 37,91 38.5,92.5 43.5,92.5 45,91 45,79 38.5,79 38,79.5 38,87.5 36.5,89 34.5,89 34,89.5 34,90.5
com on Top Layer "COM_L01_P022" (solid, pour order 22): 78.5,24 78.5,15.5 95.5,15.5 95.5,24
NetC20_2 on Top Layer "NETC20_2_L01_P005" (solid, pour order 5): 113,30 112,31 100,31 97,34 97,37.5 96,38.5 91,38.5 90.5,38 90.5,34 96.5,28 96.5,20 97.5,19 112,19 113,20
com on Top Layer "COM_L01_P021" (solid, pour order 21): 95.5,52.5 78.5,52.5 78.5,47.5 95.5,47.5
U on Top Layer "U_L01_P003" (solid, pour order 3): 96.5,96 97.5,95 97.5,91 100,88.5 111.5,88.5 113,87 113,78 111.5,76.5 97.5,76.5 96.5,77.5 96.5,85.5 90.5,91.5 90.5,95 91.5,96
+12 on Top Layer "+12_L01_P028" (solid, pour order 28): 42.8,105.8 43.5,106.5 44.5,106.5 45.2,105.8 45.2,100.2 46.4,99 63.5,99 63.5,95.5 44,95.5 42.8,96.7
GND on Top Layer "GND_L01_P027" (solid, pour order 27): 68.75,112 68.75,106.25 69.25,105.75 73.5,105.75 74,106.25 74,107.75 73.5,108.25 72,108.25 71.75,108.5 71.75,112 77,112 77.25,112.25 77.25,114 77,114.25 66.25,114.25 66,114 66,112.25 66.25,112
power on Top Layer "POWER_L01_P000" (solid, pour order 0): 136.5,80 136.5,119.5 146.5,119.5 146.5,80
GND on Layer 1 "GND_L02_P033" (solid, pour order 33): 0,125.5 86.5,125.5 86.5,103 70.3,103 70.3,0.5 0,0.5
power on Layer 1 "POWER_L02_P049" (solid, pour order 49): 136.5,119.5 146.5,119.5 146.5,80 136.5,80
VM on Layer 1 "VM_L02_P041" (solid, pour order 41): 99,73.5 100,74.5 110.5,74.5 110.5,60.5 100,60.5 99,61.5
VM on Layer 1 "VM_L02_P044" (solid, pour order 44): 99,45 100,46 111.5,46 111.5,33.5 110,32 100,32 99,33
VM on Layer 1 "VM_L02_P038" (solid, pour order 38): 99,103 112,103 112,90 100,90 99,91
com on Layer 1 "COM_L02_P024" (solid, pour order 24): 95.5,81.5 78.5,81.5 78.5,15.5 95.5,15.5
V on Layer 1 "V_L02_P008" (solid, pour order 8): 99,47.5 99.5,47 115.5,47 117.5,49 146,49 147,50 147,56 146,57 117,57 114.5,59.5 100,59.5 99,58.5
NetC20_2 on Layer 1 "NETC20_2_L02_P007" (solid, pour order 7): 147,47 145.996,48.004 118.997,47.997 113,42 113,34 110,31 99,31 99,19 128,19 134,25 134,40 136,42 146,42 147,43
U on Layer 1 "U_L02_P006" (solid, pour order 6): 147,59 145.992,57.992 118.5,58 113,63.5 113,73 109.5,76.5 99,76.5 99,88.5 127.5,88.5 134,82 134,66 136,64 146,64 147,63
GND on Layer 2 "GND_L03_P032" (solid, pour order 32): 0,125.5 86.5,125.5 86.5,103 70.3,103 70.3,0.5 0,0.5
power on Layer 2 "POWER_L03_P048" (solid, pour order 48): 136.5,119.5 146.5,119.5 146.5,80 136.5,80
VM on Layer 2 "VM_L03_P043" (solid, pour order 43): 99,73.5 100,74.5 110.5,74.5 110.5,60.5 100,60.5 99,61.5
VM on Layer 2 "VM_L03_P045" (solid, pour order 45): 99,45 100,46 111.5,46 111.5,33.5 110,32 100,32 99,33
VM on Layer 2 "VM_L03_P039" (solid, pour order 39): 99,103 112,103 112,90 100,90 99,91
com on Layer 2 "COM_L03_P023" (solid, pour order 23): 95.5,81.5 78.5,81.5 78.5,15.5 95.5,15.5
V on Layer 2 "V_L03_P015" (solid, pour order 15): 99,47.5 99.5,47 115.5,47 117.5,49 146,49 147,50 147,56 146,57 117,57 114.5,59.5 100,59.5 99,58.5
U on Layer 2 "U_L03_P013" (solid, pour order 13): 147,59 145.992,57.992 118.5,58 113,63.5 113,73 109.5,76.5 99,76.5 99,88.5 127.5,88.5 134,82 134,66 136,64 146,64 147,63
NetC20_2 on Layer 2 "NETC20_2_L03_P014" (solid, pour order 14): 147,47 145.996,48.004 118.997,47.997 113,42 113,34 110,31 99,31 99,19 128,19 134,25 134,40 136,42 146,42 147,43
power on Bottom Layer "POWER_L04_P047" (solid, pour order 47): 136.5,119.5 146.5,119.5 146.5,80 136.5,80
VM on Bottom Layer "VM_L04_P042" (solid, pour order 42): 99,73.5 100,74.5 110.5,74.5 110.5,60.5 100,60.5 99,61.5
VM on Bottom Layer "VM_L04_P046" (solid, pour order 46): 99,45 100,46 111.5,46 111.5,33.5 110,32 100,32 99,33
VM on Bottom Layer "VM_L04_P040" (solid, pour order 40): 99,103 112,103 112,90 100,90 99,91
+3.3 on Bottom Layer "+3.3_L04_P031" (solid, pour order 31): 21,65.5 9,65.5 9,63 21,63 21,54 14,54 14,51 21,51 21,37 26.5,37 27,37.5 27,39.5 26.5,40 24.4,40 24.4,61 37,61 43,55 43,49 44,48 46,48 47,49 47,56 39,64 25,64 25,75 27,77 43,77 45,79 45,87 38.5,87 38.5,80 24,80 21,77
+12 on Bottom Layer "+12_L04_P029" (solid, pour order 29): 49,12.25 49.5,12.75 49.5,19.75 50.25,20.5 74,20.5 74,24 63.5,24 63.5,49.5 73,49.5 73,52.5 63.5,52.5 63.5,78.5 73.5,78.5 73.5,81.5 63.5,81.5 63.5,99 60,99 60,24 47,24 46,23 46,12.75 46.5,12.25
com on Bottom Layer "COM_L04_P025" (solid, pour order 25): 95.5,81.5 78.5,81.5 78.5,15.5 95.5,15.5
U on Bottom Layer "U_L04_P016" (solid, pour order 16): 147,59 145.992,57.992 118.5,58 113,63.5 113,73 109.5,76.5 99,76.5 99,88.5 127.5,88.5 134,82 134,66 136,64 146,64 147,63
V on Bottom Layer "V_L04_P018" (solid, pour order 18): 99,47.5 99.5,47 115.5,47 117.5,49 146,49 147,50 147,56 146,57 117,57 114.5,59.5 100,59.5 99,58.5
NetC20_2 on Bottom Layer "NETC20_2_L04_P017" (solid, pour order 17): 147,47 145.996,48.004 118.997,47.997 113,42 113,34 110,31 99,31 99,19 128,19 134,25 134,40 136,42 146,42 147,43

## Keep-outs
Keep-Out Layer:
  circle w1: c100,109 r2
  circle w1: c155,122 r2
  circle w1: c5,5 r2
  circle w1: c5,121 r2
  lines w0.5: 0,4 ccw(c4,4) 4,0 156,0 ccw(c156,4) 160,4 160,122 ccw(c156,122) 156,126 4,126 ccw(c4,122) 0,122 0,4

## Silkscreen, mask and mechanical layers (free items; w line width, h text height)
Top Overlay:
  text "+12V" at 8.754,109.246 h1.52 r270
  text "+3.3V" at 12.754,96.754 h1.52
  text "RST" at 14.254,27.254 h1.52
  text "LED" at 19.254,9.246 h1.52 r270